# Altium PCB projet_pcb_bluepill_f103.PCBDOC
Units mil, origin at the board's own origin, x right, y up, seen from the top; angles counter-clockwise.
Board outline 3545 x 2760 mil, 2 copper layers (TopLayer, BottomLayer); 33 components, 45 nets, 142 pads, 41 vias.
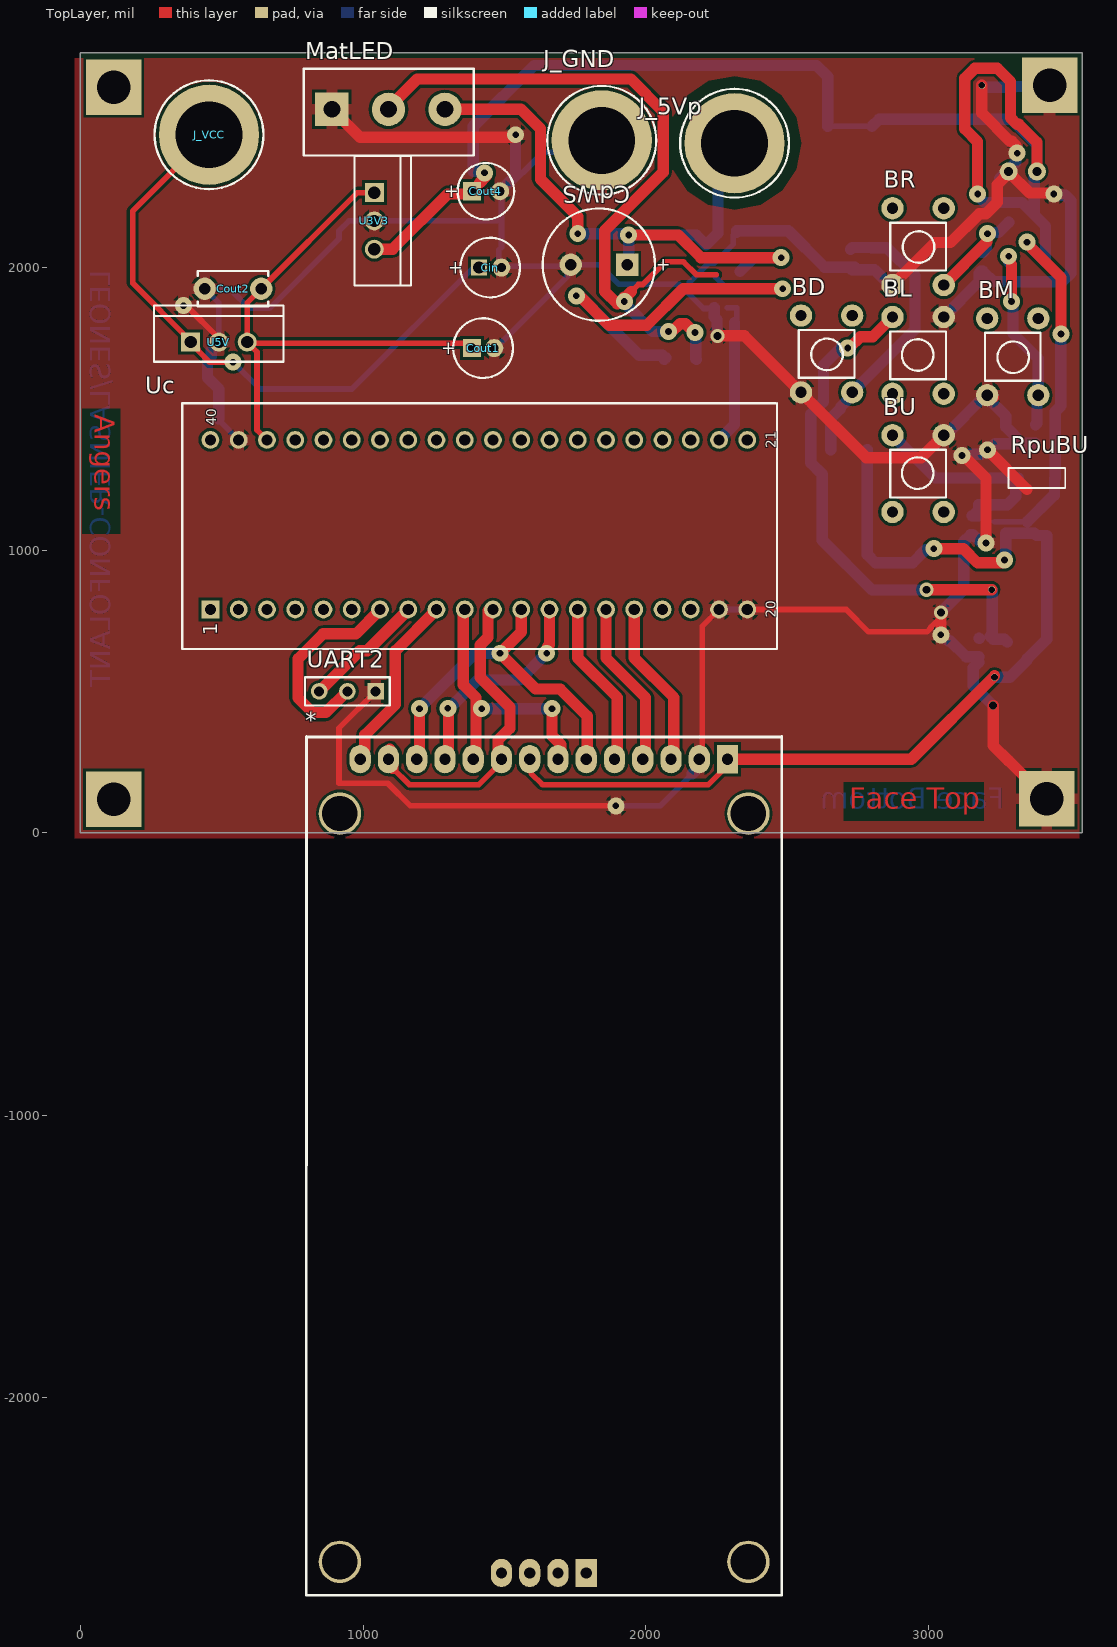
[diagram p0: TopLayer view]
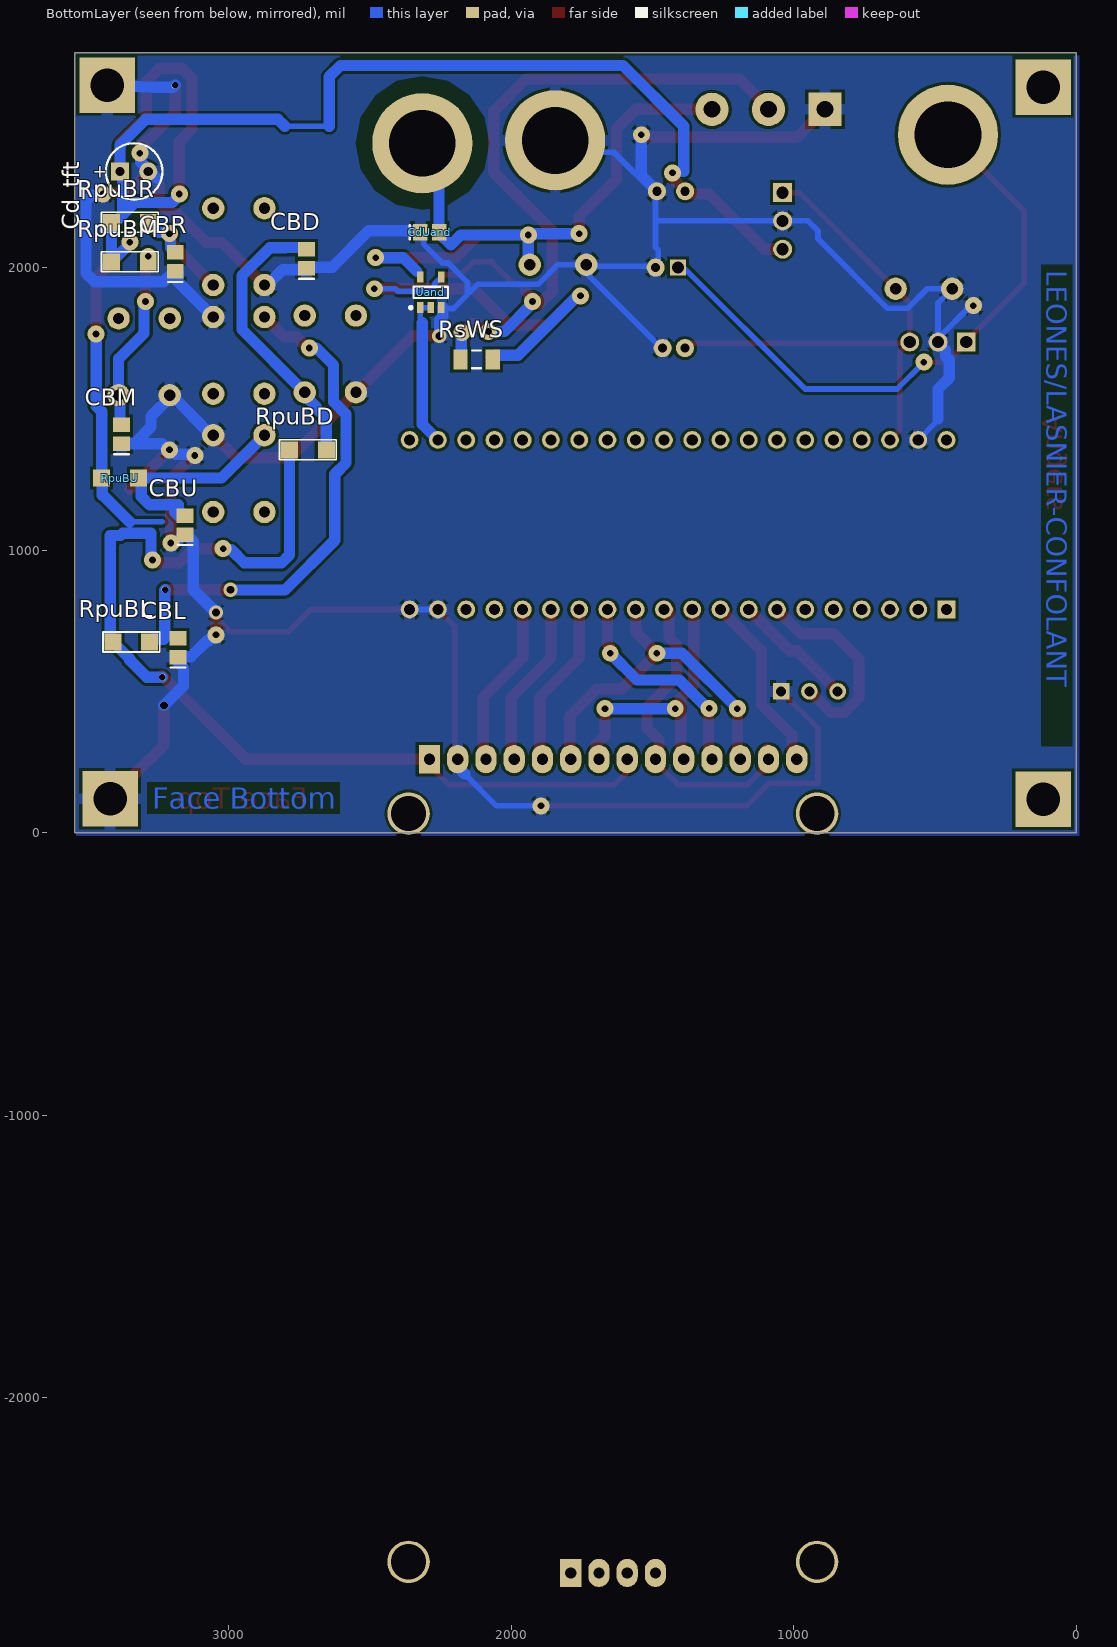
[diagram p1: BottomLayer view, seen from below]

## Layer stack, top to bottom
TopSolder: solder mask 0.4, Solder Resist, Dk 3.5
TopLayer: signal copper 1.4
Dielectric1: core 12.6, FR-4, Dk 4.8
BottomLayer: signal copper 1.4
BottomSolder: solder mask 0.4, Solder Resist, Dk 3.5

## Board outline
0,0 0,2760 3545,2760 3545,0

## Design rules (kind name [scope] priority, off if disabled: settings)
Clearance Clearance_1 [All] p1: gap=10 ignorepadtopadclearanceinfootprint=FALSE except(0: Arc-Hole Track-Hole SMDPad-Hole THPad-Hole Via-Hole Fill-Hole Poly-Hole Region-Hole Text-Hole)
Clearance PowerPlaneClearance [InNamedPolygon('Bot-GND') Or  InNamedPolygon('Top-GND')] p2: gap=40 ignorepadtopadclearanceinfootprint=FALSE except(0: Arc-Hole Track-Hole SMDPad-Hole THPad-Hole Via-Hole Fill-Hole Poly-Hole Region-Hole Text-Hole)
Clearance [All] p3: gap=20 ignorepadtopadclearanceinfootprint=TRUE except(0: Arc-Hole Track-Hole SMDPad-Hole THPad-Hole Via-Hole Fill-Hole Poly-Hole Region-Hole Text-Hole)
FabricationTestPointUsage TestPointUsage [All] p1: valid=0 allowmultiple=FALSE
FabricationTestpoint Testpoint [All] p1: side=3 testpointundercomponent=TRUE minsize=40 maxsize=100 preferedsize=60 minholesize=20 maxholesize=40 preferedholesize=32 testpointgrid=1 allowsidetop=TRUE allowsidebottom=TRUE usegrid=TRUE gridtolerance=0.01
Height [All] p1: minheight=0 maxheight=2000 prefheight=500
HoleSize [All] p1: absolutevalues=TRUE maxlimit=300 minlimit=11.81 maxpercent=80.000 minpercent=20.000
PlaneClearance [All] p1: clearance=40
PlaneConnect [All] p1: planeconnectstyle=Relief reliefexpansion=19.68 reliefentries=4 reliefconductorwidth=40 reliefairgap=19.68
PolygonConnect [All] p1: connectstyle=Relief reliefconductorwidth=40 reliefentries=4 polygonreliefangle="90 Angle" airgapwidth=10
RoutingVias [All] p1: holewidth=23.62 width=60 viastyle="Through Hole" minholewidth=23.62 minwidth=60 maxholewidth=23.62 maxwidth=60
SilkToSolderMaskClearance SilkscreenOverComponentPads [IsPad] p1: minsilkscreentomaskgap=10 clearancetoexposedcopper=TRUE
SolderMaskExpansion [All] p1: expansion=2
Width [All] p1: maxlimit=1000 minlimit=20 preferedwidth=40
23 further rules are at their usual default settings.

## Classes and differential pairs
component class projet_pcb_bluepill_f103: * BD BR BU CBD CBL CBM CBR CBU Cd_tft CdUand CdWS Cin Cout1 Cout2 Cout4 J_5Vp J_GND J_VCC MatLED RpuBD RpuBL RpuBM RpuBU RsWS U3V3 U5V Uand UART2 Uc

## Components (designator, comment, footprint, x,y, rotation, side; value= is the part's Value field where it differs from the comment)
* "2.4_TFT_TOUCH" 2.4_TFT_TOUCH 800,340 r270 top
BD "BOUTON_POUSSOIR_MINIATURE_TRAVERSANT" BOUTON_POUSSE_PLAT_6x6 2542.13,1542.6 r0 top
BL "BOUTON_POUSSOIR_MINIATURE_TRAVERSANT" BOUTON_POUSSE_PLAT_6x6 3062.87,1840.75 r180 top
BM "BOUTON_POUSSOIR_MINIATURE_TRAVERSANT" BOUTON_POUSSE_PLAT_6x6 3201.02,1532.6 r0 top
BR "BOUTON_POUSSOIR_MINIATURE_TRAVERSANT" BOUTON_POUSSE_PLAT_6x6 2866.02,1922.6 r0 top
BU "BOUTON_POUSSOIR_MINIATURE_TRAVERSANT" BOUTON_POUSSE_PLAT_6x6 3062.87,1422.4 r180 top
CBD "Condensateur 0805" C0805_N 2725,2031.54 r90 bottom value=100nF
CBL "Condensateur 0805" C0805_N 3180,655 r90 bottom value=100nF
CBM "Condensateur 0805" C0805_N 3380,1410 r90 bottom value=100nF
CBR "Condensateur 0805" C0805_N 3190,2020 r90 bottom value=100nF
CBU "Condensateur 0805" C0805_N 3155,1088.46 r90 bottom value=100nF
Cd_tft "10uF" CONDENSATEUR_POLARISE_ELECTROLYTIQUE_RADIAL_2.54/5.08 3385,2340 r180 bottom
CdUand "CONDENSATEUR_CER_RAD_5.08" C0805_N 2288.46,2125 r180 bottom value=100nF
CdWS "CONDENSATEUR_POL_ELECTROLY_RAD_5.08/10.16" CONDENSATEUR_POLARISE_ELECTROLYTIQUE_RADIAL_5.08/10.16 1935,2010 r180 top value=470µF/25V
Cin "CONDENSATEUR_POL_ELECTROLY_RAD_2.0/5.08" CONDENSATEUR_POLARISE_ELECTROLYTIQUE_RADIAL_2.0/5.08#1 1450,2000 r0 top value=10µF/>25V
Cout1 "CONDENSATEUR_POL_ELECTROLY_RAD_2.0/5.08" CONDENSATEUR_POLARISE_ELECTROLYTIQUE_RADIAL_2.0/5.08#2 1425,1715 r0 top value=1µF/>10V
Cout2 "CONDENSATEUR_CER_RAD_5.08" CONDENSATEUR_CERAMIQUE_RADIAL_5.08 440,1925 r0 top value=100nF
Cout4 "CONDENSATEUR_POL_ELECTROLY_RAD_2.54/5.08" CONDENSATEUR_POLARISE_ELECTROLYTIQUE_RADIAL_2.54/5.08 1385,2270 r0 top value=4.7µF/63V
J_5Vp "DOUILLE BANANE 4mm" DOUILLE_BANANE_4mm#1 2315,2440 r0 top
J_GND "DOUILLE BANANE 4mm" DOUILLE_BANANE_4mm#2 1845,2450 r0 top
J_VCC "DOUILLE BANANE 4mm" DOUILLE_BANANE_4mm#2 455,2470 r0 top
MatLED "BORNIER3 DROIT A VIS" BORNIER3_A_VIS 890,2560 r0 top
RpuBD "RESISTANCE_CMS_1206" RESISTANCE_CMS_1206#1 2655,1355 r0 bottom value=10k
RpuBL "RESISTANCE_CMS_1206" RESISTANCE_CMS_1206#1 3280,675 r0 bottom value=10k
RpuBM "RESISTANCE_CMS_1206" RESISTANCE_CMS_1206#1 3285,2020 r0 bottom value=10k
RpuBR "RESISTANCE_CMS_1206" RESISTANCE_CMS_1206#1 3285,2160 r0 bottom value=10k
RpuBU "RESISTANCE_CMS_1206" RESISTANCE_CMS_1206#2 3320,1255 r0 top value=10k
RsWS "220" R1206_N 2122.91,1675 r180 bottom
U3V3 "REGULATEUR_TO220_78XX" REGULATEUR_TO220_78XX 1040,2165 r270 top
U5V "REGULATEUR_TO220_78XX" REGULATEUR_TO220_78XX 490,1736.25 r0 top
Uand "SN74AHCT1G08DBVR" DBV0005A_N 2285,1912.13 r90 bottom
UART2 "BARRETTE3" HDR1X3 1045,500 r180 top
Uc "STM32F103C8T6/PCB_DIP40" STM32F103C8T6_DIP40 460,790 r90 top

## Footprints (in the part's own frame and the unit in brackets; to place one, negate y for a bottom-side part, rotate by r counter-clockwise, add the part's x,y. Pads: shape width x height; smd on the part's side, far side on the other; paste and mask are expansions set on the pad)
2.4_TFT_TOUCH [mil]
  round 150 hole 125: 0(272.44,1563.78) 0(272.44,118.11) 0(2920.47,1563.78) 0(2920.47,118.11)
  rect 100x75 hole 40: 1(80,1490) 18(2959.84,990)
  oval 100x75 hole 40: 2(80,1390) 3(80,1290) 4(80,1190) 5(80,1090) 6(80,990) 7(80,890) 8(80,790) 9(80,690) 10(80,590) 11(80,490) 12(80,390) 13(80,290) 14(80,190) 15(2959.84,690) 16(2959.84,790) 17(2959.84,890)
  silkscreen extent 0,-1 3039,1682, body extent 1,-15 3039,1667, height 650
BORNIER3_A_VIS [mm] "BORNIER 3 PLOTS A VIS ; VERTICAL ; ESPACEMENT BROCHES = 5.08mm"
  rect 3x3 hole 1.5: 1(0,0)
  round 3 hole 1.5: 2(5.08,0) 3(10.16,0)
  silkscreen extent -2.54,-4.16 12.74,3.64, body extent -2.4,-4 12.6,3.5, height 10
BOUTON_POUSSE_PLAT_6x6 [mil] "BOUTON POUSSOIR MINIATURE ON/OFF; BOUTON PLAT/LONG ; ESPACEMENT BROCHES = 7.62mm/5.08mm"
  round 79 hole 40: 1(7.87,15.75) 2(188.98,15.75) 3(188.98,287.4) 4(7.87,287.4)
  silkscreen extent 0,67 197,236, body extent -22,-1 222,310, height 276
C0805_N [mm] "Chip Capacitor, Body 2.0x1.3mm, IPC Medium Density"
  rect 1.3x1.5 smd: 1(-0.85,0) 2(0.85,0)
  silkscreen extent -1.8,-0.65 -1.8,0.65, body extent -0.99,-0.63 1.01,0.62, height 0.8
CONDENSATEUR_CERAMIQUE_RADIAL_5.08 [mil] "CONDENSATEUR TRAVERSANT CERAMIQUE RADIAL ; DIMENSIONS : 3.17mm x 5.08mm"
  round 79 hole 40: 1(0,0) 2(200,0)
  silkscreen extent -25,-62 225,62, body extent -11,-43 209,42, height 148
CONDENSATEUR_POLARISE_ELECTROLYTIQUE_RADIAL_2.0/5.08#1 [mil] "CONDENSATEUR POLARISE ELECTROLYTIQUE RADIAL ; DIAMETRE : 5.08mm ; ESPACEMENT BROCHES : 2mm"
  rect 56.93x56.93 hole 43.31: 1(-39.37,0)
  round 64 hole 32: 2(39.37,0)
  silkscreen extent -105,-106 106,106, body extent -98,-98 98,98, height 433
CONDENSATEUR_POLARISE_ELECTROLYTIQUE_RADIAL_2.0/5.08#2 [mil] "CONDENSATEUR POLARISE ELECTROLYTIQUE RADIAL ; DIAMETRE : 5.08mm ; ESPACEMENT BROCHES : 2mm"
  rect 64x64 / inner round 64 / far side round 64 hole 32: 1(-39.37,0)
  round 64 hole 32: 2(39.37,0)
  silkscreen extent -105,-106 106,106, body extent -98,-98 98,98, height 433
CONDENSATEUR_POLARISE_ELECTROLYTIQUE_RADIAL_2.54/5.08 [mil] "CONDENSATEUR_POLARISE_ELECTROLYTIQUE_RADIAL ; DIAMETRE : 5.08mm ; ESPACEMENT BROCHES : 2.54mm"
  rect 64x64 / inner round 64 / far side round 64 hole 32: 1(0,0)
  round 64 hole 32: 2(100,0)
  silkscreen extent -50,-100 150,100, body extent -50,-101 149,98, height 446
CONDENSATEUR_POLARISE_ELECTROLYTIQUE_RADIAL_5.08/10.16 [mil] "CONDENSATEUR POLARISE ELECTROLYTIQUE RADIAL ; DIAMETRE : 10.16mm ; ESPACEMENT BROCHES : 5.08mm"
  rect 79x79 / inner round 79 / far side round 79 hole 40: 1(0,0)
  round 79 hole 40: 2(200,0)
  silkscreen extent -98,-199 299,198, body extent -98,-197 295,197, height 630
DBV0005A_N [mm] "SOT23, 5-Leads, Body 3.05x1.75mm, Pitch 0.95mm, IPC Medium Density"
  rect 1x0.6 smd: 1(-1.375,0.95) 2(-1.375,0) 3(-1.375,-0.95) 4(1.375,-0.95) 5(1.375,0.95)
  silkscreen extent -1.5,-1.55 0.5,1.93, body extent -1.42,-1.46 1.42,1.46, height 1.08
DOUILLE_BANANE_4mm#1 [mm] "DOUILLE BANANE ; DIAMETRE PASSAGE CONTACT = 4 mm ; DIAMETRE PERCAGE = 6 mm"
  round 9 hole 6: 1(0,0)
  TopLayer pour cut-out: -5.55,2.35 -4.2,4.3 -2.3,5.6 0,6 2.3,5.6 4.2,4.3 5.55,2.35 6,0 5.55,-2.35 4.3,-4.25 2.35,-5.55 0,-6 -2.35,-5.55 -4.2,-4.3 -5.55,-2.35 -6,0
  BottomLayer pour cut-out: -5.55,2.35 -4.2,4.3 -2.3,5.6 0,6 2.3,5.6 4.2,4.3 5.55,2.35 6,0 5.55,-2.35 4.3,-4.25 2.35,-5.55 0,-6 -2.35,-5.55 -4.2,-4.3 -5.55,-2.35 -6,0
  silkscreen extent -4.89,-4.89 4.89,4.89, body extent -5.5,-5.6 5.63,5.53, height 4.79
DOUILLE_BANANE_4mm#2 [mm] "DOUILLE BANANE ; DIAMETRE PASSAGE CONTACT = 4 mm ; DIAMETRE PERCAGE = 6 mm"
  round 9 hole 6: 1(0,0)
  silkscreen extent -4.89,-4.89 4.89,4.89, body extent -5.5,-5.6 5.63,5.53, height 4.79
HDR1X3 [mm] "Connector; Header; 3 Position"
  rect 1.5x1.5 hole 0.9: 1(0,0)
  round 1.5 hole 0.9: 2(2.54,0) 3(5.08,0)
  silkscreen extent -1.27,-1.27 6.35,1.27
R1206_N [mm] "Chip Resistor, Body 3.2x1.6mm, IPC Medium Density"
  rect 1.3x1.8 smd: 1(-1.45,0) 2(1.45,0)
  silkscreen extent -0.4,-0.8 0.4,0.8, body extent -1.68,-0.87 1.68,0.87, height 0.71
REGULATEUR_TO220_78XX [mm] "BOITIER TO220 ; DIMENSIONS : 11.2mm x 4.7mm ; ESPACEMENT BROCHES : 2.54 mm"
  rect 1.7x1.7 hole 1.1: 1(-2.54,0)
  round 1.7 hole 1.1: 2(0,0) 3(2.54,0)
  silkscreen extent -5.83,-1.77 5.8,3.29, body extent -5.61,-1.59 5.61,3.1, height 19.33
RESISTANCE_CMS_1206#1 [mil] "RESISTANCE CMS 1206 ; DIMENSIONS : 3.2mm x 1.6mm"
  rect 60x60 smd: 1(0,0) 2(130,0)
  silkscreen extent -35,-35 165,35, body extent 0,-31 126,31, height 39
RESISTANCE_CMS_1206#2 [mil] "RESISTANCE CMS 1206 ; DIMENSIONS : 3.2mm x 1.6mm"
  rect 60x60 smd far side: 1(0,0) 2(130,0)
  silkscreen extent -35,-35 165,35, body extent 0,-31 126,31, height 39
STM32F103C8T6_DIP40 [mm] "STM32F103 monté sur DIP40"
  rect 1.6x1.6 hole 1: 1(0,0)
  round 1.6 hole 1: 2(0,-2.54) 3(0,-5.08) 4(0,-7.62) 5(0,-10.16) 6(0,-12.7) 7(0,-15.24) 8(0,-17.78) 9(0,-20.32) 10(0,-22.86) 11(0,-25.4) 12(0,-27.94) 13(0,-30.48) 14(0,-33.02) 15(0,-35.56) 16(0,-38.1) 17(0,-40.64) 18(0,-43.18) 19(0,-45.72) 20(0,-48.26) 21(15.24,-48.26) 22(15.24,-45.72) 23(15.24,-43.18) 24(15.24,-40.64) 25(15.24,-38.1) 26(15.24,-35.56) 27(15.24,-33.02) 28(15.24,-30.48) 29(15.24,-27.94) 30(15.24,-25.4) 31(15.24,-22.86) 32(15.24,-20.32) 33(15.24,-17.78) 34(15.24,-15.24) 35(15.24,-12.7) 36(15.24,-10.16) 37(15.24,-7.62) 38(15.24,-5.08) 39(15.24,-2.54) 40(15.24,0)
  silkscreen extent -3.56,-50.92 18.54,2.54, body extent -3.63,-51.04 18.37,6.1, height 20.63

## Part data
BD BL BM BR BU: "BOUTON POUSSOIR MINIATURE TRAVERSANT ON/OFF", Type=B_POUSS_MINI_T
CBD CBL CBM CBR CBU: library part CONDENSATEUR_CER_RAD_5.08, Type=RADIAL_5.08
Cd_tft: library part Condensateur, "Capacitor", LatestRevisionDate=17-Jul-2002, LatestRevisionNote="Re-released for DXP Platform.", PackageReference=RAD-0.3, Published=8-Jun-2000, Publisher="Altium Limited"
CdUand: "CONDENSATEUR_CER_CMS_0805", Type=RADIAL_5.08
CdWS: "CONDENSATEUR POLARISE ELECTROLYTIQUE RADIAL 5.08/10.16", Type=POL_RAD_5.08/10.16
Cin Cout1: "CONDENSATEUR POLARISE ELECTROLYTIQUE RADIAL 2.0/5.08", Type=POL_RAD_2.0/5.08
Cout2: "CONDENSATEUR TRAVERSANT CERAMIQUE RADIAL 5.08mm", Type=RADIAL_5.08
Cout4: "CONDENSATEUR POLARISE ELECTROLYTIQUE RADIAL 2.54/5.08", Type=POL_RAD_2.54/5.08
J_5Vp J_GND J_VCC: library part DOUILLE_BANANE_4mm, "DOUILLE BANANE 4 mm", Type=BANANE_4mm
MatLED: library part "BORNIER3_DROIT_A VIS", "BORNIER 3 PLOTS DROIT A VIS 5.08mm", Type=BORNIER3_D
RpuBD RpuBL RpuBM RpuBR RpuBU: "RESISTANCE CMS 1206", Type=CMS_1206
RsWS: library part Resistor, "Resistor", LatestRevisionDate=17-Jul-2002, LatestRevisionNote="Re-released for DXP Platform.", PackageReference=AXIAL-0.5, Published=8-Jun-2000, Publisher="Altium Limited"
U3V3 U5V: "REGULATEUR DE TENSION POSITIVE 78XX BOITIER TO220", Package=(TO220)
  U3V3: Type=LF33CV
  U5V: Type=7805
Uand: "Single 2-Input Positive-AND Gate, DBV0005A, LARGE T&R", F @ Nom Voltage(Max)(Mhz)=75, Generic Part Number=SN74AHCT1G08, ICC @ Nom Voltage(Max)(mA)=0.01, Manufacturer="Texas Instruments", Operating Temperature Range(C)="-40 to 125", Rating=Catalog, Supplier Part Number 1=595-SN74AHCT1G08DBVR, tpd @ Nom Voltage(Max)(ns)=7.1, Voltage(Nom)(V)=5, 3-State Output=No, Bits(#)=1, ComponentLink1Description="Manufacturer URL", ComponentLink1URL=http://www.ti.com/, ComponentLink2Description=Datasheet, ComponentLink2URL=http://www.ti.com/lit/ds/symlink/sn74ahct1g08.pdf, DatasheetVersion=SCLS315P, Gate Type=AND, Input Type=CMOS, Logic=True, Output Drive (IOL/IOH)(Max)(mA)=8/-8, Output Type=CMOS, PackageReference=DBV0005A, PartNumber=SN74AHCT1G08DBVR, Schmitt Trigger=No, Sub-Family="AND Gate", Supplier 1=Mouser, Supplier 2=Digi-Key, Supplier 3=Digi-Key, Supplier 4=Digi-Key, Supplier Part Number 2=296-1113-2-ND, Supplier Part Number 3=296-1113-1-ND, Supplier Part Number 4=296-1113-6-ND, Technology Family=AHCT, VCC(Max)(V)=5.5, VCC(Min)(V)=2
UART2: "Header, 3-Pin", LatestRevisionDate=17-Jul-2002, LatestRevisionNote="Re-released for DXP Platform.", Publisher="Altium Limited"
Uc: "MICROCONTROLEUR 32 BITS - 72MHz - 34 I/O - 64 KO : FLASH - 20KO RAM - 10 CANAUX A/D 12 BITS - DIP40 - UART, SPI, I2C, USB, CAN", Package=DIP40, Type=STM32F103C8T6

## Free pads (board coordinates)
  rect 196.85x196.85 hole 118.11: 1(118.11,2637.8) 2(118.11,118.11) 3(3420,120) 4(3430,2645)

## Via types
v1: diameter 60, hole 23.62, TopLayer to BottomLayer, 34 vias
v2: diameter 50, hole 28, TopLayer to BottomLayer, 3 vias
v3: diameter 25, hole 23.62, TopLayer to BottomLayer, 3 vias
v4: diameter 28, hole 28, TopLayer to BottomLayer, 1 vias

## Nets (pads, with @x,y where several pads share a name; then routed paths per layer and width w, separated by ;. In a path a pad name is that pad's centre, name@x,y a point inside that pad or via, vN(x,y) a via of type N, cw(c..) or ccw(c..) an arc to the next point about the centre after c; other vN are vias at no path point)
+3V3: *.1 *.8 Cd_tft.1 Cout4.1 RpuBD.2 RpuBL.2 RpuBM.2 RpuBR.2 RpuBU.2 U3V3.3 | length 9606.2
  TopLayer w20: *.8@1595,255 1595,210 1635,170 2222.1,170 2290,237.9 *.1
  TopLayer w40: U3V3.3@1045,2065 1105,2065 1300,2260 Cout4.1@1370,2260 ; Cout4.1@1413,2299.82 1437,2323.82 1437,2328 v1(1430,2335) ; *.8 *.8@1595,255 ; *.1@2305,285 2305,262.5 2307.5,260 2940,260 v3@3235,555 ; v1(3020,1005) 3125.21,1005 3175.21,955 3260,955 v1(3270,965) ; v1(3175,2260) 3175,2445.13 3130,2490.13 3130,2669.85 3165.15,2705 3245,2705 3291.57,2658.43 3291.57,2530.01 3315.01,2506.57 3321.45,2506.57 3385,2443.03 Cd_tft.1 ; v1(3350,2090) 3350,2085 3470,1965 v1(3470,1765)
  BottomLayer w20: *.1@2298.49,251.51 *.1@2303.53,251.51 ; 2645,2500 2801.47,2500 ; 3235,1100 3350.41,1100
  BottomLayer w40: Cout4.1@1390,2260 Cout4.1@1390,2270 ; v1@1430,2340 1390,2340 1390,2500 1605,2715 2605,2715 2645,2675 2645,2500 ; RpuBD.2 2785,983.43 2813.43,955 2945,955 2991.17,1001.17 3016.17,1001.17 v1(3020,1005) ; 2801.47,2500 2825.97,2524.5 3294.49,2524.5 3385,2433.99 Cd_tft.1 3375,2330 3375,2200 ; v1(3175,2260) 3175,2255 3200,2230 3331.57,2230 3415,2146.57 RpuBM.2 3350,2085 v1(3350,2090) ; v3(3235,550) 3290,550 3350,610 3350,615 RpuBL.2 3420,685 3420,1051.68 3383.32,1051.68 3375,1060 3275,1060 3275,970 3273.83,968.83 v1@3273.83,988.97 ; 3350.41,1100 3444.59,1194.18 ; 3447.5,1194.18 3447.5,1252.5 RpuBU.2 3450,1490.25 3469.5,1509.75 3469.5,1764.5 v1(3470,1765)
+3V3_BP: Uc.40
+3V3_BP2: Uc.18
+5V: Cout1.1 Cout2.2 U3V3.1 U5V.3 Uc.38 | length 1947.4
  TopLayer w20: Uc.38 625,1425 625,1701.25 U5V.3 U5V.3@590,1740 ; U3V3.1@1040,2275 U3V3.1@1041.06,2275 ; U3V3.1@1043.94,2265 1041.06,2265 U3V3.1 980,2265 Cout2.2 590,1875 U5V.3@590,1740 ; Cout1.1@1400.63,1725 1393.13,1732.5 597.5,1732.5 U5V.3@590,1740
+5V_Puissance: CdUand.2 CdWS.1 J_5Vp.1 MatLED.3 Uand.5 | length 2560.6
  TopLayer w40: MatLED.3 1558.99,2560 1627.83,2491.16 1627.83,2312.58 1760,2180.41 v1(1760,2120) ; v1(1940,2115) 2115.71,2115 2195.71,2035 v1(2480,2035) ; J_5Vp.1 J_5Vp.1@2350.05,2404.95
  BottomLayer w40: v1(1760,2120) 1935,2120 v1(1940,2115) ; CdWS.1 1940,2015 v1(1940,2115) ; J_5Vp.1 2256.34,2381.34 2256.34,2126.34 CdUand.2 2255,2121.06 2213.94,2080 2178.94,2115 v1(1940,2115) ; Uand.5@2334.13,1985.87 2383.27,2035 v1(2480,2035)
GND: *.2 BD.1 BL.1 BM.1 BR.1 BU.1 CBD.1 CBL.1 CBM.1 CBR.1 CBU.1 Cd_tft.2 CdUand.1 CdWS.2 Cin.2 Cout1.2 Cout2.1 Cout4.2 J_GND.1 MatLED.1 pad.3 pad.4 U3V3.2 U5V.2 Uand.3 UART2.1 Uc.19 Uc.20 Uc.39 | length 15262.5
  TopLayer w20: v1(365,1865) 374.36,1865 490,1749.36 U5V.2@490,1740 ; UART2.1 915,370 915,175 1087.72,175 1167.72,95 v1(1895,95) ; *.2@2175,235 2200,260 2200,730 Uc.19 ; *.2 *.2@2190,287.38 ; Uc.20 2710,790 2789.5,710.5 2995.5,710.5 3010,725 3010,727.93 3045.61,763.55 3046.1,764.03 v2@3046.1,780
  TopLayer w40: MatLED.1@885,2575 885,2565 MatLED.1 989.06,2460.94 1530.94,2460.94 v1(1540,2470) ; v2(2255,1758.35) 2350,1758.35 BD.1 2781.19,1327.15 2975.5,1327.15 BU.1 ; BR.1 3023.96,2088.41 3079.41,2088.41 3181.01,2190 3203.99,2190 3245,2231.01 3245,2293.51 3285,2333.51 Cd_tft.2@3285,2338.18 ; v1(3045.12,700) 3045.61,700.49 3045.61,763.55 v2(3045.61,779.51) v2@3046.1,780 ; v1(3120,1335) 3125,1335 3205,1255 v1(3205,1025) ; v3(3190,2645) 3190,2546.73 3290.15,2446.57 3296.6,2446.57 3311.17,2432 3311.17,2408.83 v1(3315,2405) ; v1(3210,1355) 3350,1215 ; BM.1@3222.54,1547.46 BM.1@3230,1540 ; v4(3230,450) 3230,308.31 3283.31,254.99 3285.01,254.99 pad.3 ; Cd_tft.2 Cd_tft.2@3285,2338.18 ; v1(3445,2260) 3441.17,2263.83 3359.35,2263.83 Cd_tft.2@3285,2338.18
  BottomLayer w20: v1(365,1865) 374.36,1865 490,1749.36 490,1875 Cout2.1 528.27,1925 597.77,1855.5 668.79,1855.5 915,2101.71 915,2130 950,2165 U3V3.2 1489,2165 1490,2166 ; 495,1455 Uc.39 ; Cin.2@1471.58,2008.42 1480,2000 1480,2062 1490,2072 1490,2166 ; Cout1.2@1479.37,1725 1723.71,1969.34 1723.71,1998.71 CdWS.2@1730,2005 ; Cin.2@1485,2005 CdWS.2@1730,2005 ; J_GND.1 1802.83,2407.83 1637.83,2407.83 1490,2260 1490,2166 ; v1(1895,95) 2052.1,95 2165,207.9 ; Uand.3@2243.19,1857.99 2240.2,1855 2205,1855 2155,1905 ; Uc.19 Uc.20 ; CdUand.1 2310.59,2113.66 2310.59,2083.05 2243.49,2015.94 2223.36,2015.94 2155,1947.58 2155,1905 ; CdWS.2@1730,2005 CdWS.2 1836.71,2010 1906.21,1940.5 2119.5,1940.5 2155,1905
  BottomLayer w40: 490,1465 490,1570 450,1610 450,1672.75 463.46,1686.22 463.46,1707.46 481.01,1725 490,1725 U5V.2 ; Cout4.2 1540,2325 v1(1540,2470) ; 2165,207.9 2165,208.03 2187.5,230.53 *.2@2187.5,252.5 ; Uand.3@2243.19,1857.99 2243.19,1825.88 2253.09,1815.98 2253.09,1760.26 v2(2255,1758.35) ; CdUand.1 2321.93,2128.94 2322.99,2130 2505,2130 2633.46,2001.54 CBD.1@2740,2001.54 ; CBD.1 2730.59,1992.48 2809.21,1992.48 2863.34,1938.35 BR.1 ; v1(3045.12,700) 3050.54,700 3071.09,679.44 3077.34,679.44 3133.9,622.87 3178.66,622.87 CBL.1 ; v2@3046.1,780 3125.6,859.5 3125.6,1029.54 3151.06,1055 CBU.1 ; BU.1 3061.1,1406.65 3202.8,1548.35 BM.1 3208.9,1540.1 3275.13,1473.87 3275.13,1436.65 3333.9,1377.87 3378.66,1377.87 CBM.1 3236.95,1376.54 3215.41,1355 v1(3210,1355) 3204.59,1355 3188.41,1338.83 3123.83,1338.83 v1(3120,1335) ; BL.1 3180.47,1950.47 3180.47,1980.94 3186.06,1986.54 CBR.1 3193.94,1986.54 3230.47,1950 3475,1950 3505,1980 3505,2236.57 3485.4,2256.17 3448.83,2256.17 v1(3445,2260) ; CBU.1@3160.59,1049.41 CBU.1 ; CBL.1@3170.47,612.01 3170,611.54 3178.77,602.77 3160,583.99 3160,520 v4(3230,450) ; v3(3190,2645) 3197.2,2637.8 3271.61,2637.8 pad.4 ; v1(3205,1025) 3201.17,1028.83 3185.11,1028.83 3158.94,1055 CBU.1 ; 3253.51,2315 3278.51,2340 Cd_tft.2@3282.5,2340 ; Cd_tft.2 Cd_tft.2@3282.5,2340 ; v1(3315,2405) 3311.17,2401.17 3311.17,2372.67 3282.5,2343.99 Cd_tft.2@3282.5,2340
LEDS_WS2812: Uand.1 Uand.2 Uc.22 | length 526.8
  BottomLayer w20: Uand.2@2289.41,1857.99 Uand.1 2322.4,1812.4 2315,1805
  BottomLayer w40: Uc.22 2315,1445 2315,1805
NetBD_2: BD.2 CBD.2 RpuBD.1 | length 1011.7
  BottomLayer w40: RpuBD.1 2655,1466.06 2689.5,1500.56 2689.5,1506.19 2731.1,1547.79 BD.2 2953.4,1780.64 2953.4,1971.28 2854.67,2070 2800,2070 2799.41,2070.59 2730.59,2070.59 CBD.2
NetBL_2: BL.2 CBL.2 RpuBL.1 | length 1884
  TopLayer w40: v1(2715,1715) 2720.41,1715 2760.05,1754.64 2803.54,1754.64 BL.2 ; v2@2992.94,858.94 2994,860 v3(3225,860)
  BottomLayer w40: v1(2715,1715) 2690,1715 2629.5,1654.5 2629.5,1525.42 2585,1480.92 2585,1308.43 2625,1268.43 2625,1035 2801.06,858.94 2992.94,858.94 v2@2994.5,860.5 ; CBL.2 CBL.2@3181.34,687.13 ; v3(3225,860) 3227.03,857.97 3227.03,702.03 3220,695 3230,685 3270,685 RpuBL.1
  other v2: 2993.72,859.72
NetBM_2: BM.2 CBM.2 RpuBM.1 | length 624.2
  TopLayer w40: v1(3295,1880) 3295,2010
  BottomLayer w40: RpuBM.1 RpuBM.1@3295,2010 ; v1(3295,1880) 3300,1875 3300,1766.95 3390,1676.95 BM.2 3385,1543.35 3385,1448.46 CBM.2
  other v1: 3285,2040
NetBR_2: BR.2 CBR.2 RpuBR.1 | length 425.1
  TopLayer w40: BR.2@3055,1927.79 BR.2 3206.92,2090.27 3206.92,2116.92 v1(3210,2120)
  BottomLayer w40: CBR.2 3193.94,2053.46 3199.53,2059.06 3199.53,2062.99 3206.17,2069.64 3206.17,2116.17 v1(3210,2120) 3213.83,2123.83 3248.83,2123.83 RpuBR.1
NetBU_2: BU.2 CBU.2 RpuBU.1 | length 814.4
  BottomLayer w40: BU.2 3025.55,1255 RpuBU.1 3310,1245 3310,1190 3280,1160 3178.43,1160 3178.43,1141.42 3158.94,1121.93 CBU.2 3155.96,1120.96 3176.97,1120.96 3191.01,1135
NetRsWS_2: RsWS.2 Uand.4 | length 1519.4
  TopLayer w40: v1(1755,1900) 1766.51,1900 1871.01,1795.5 2003.85,1795.5 2133.35,1925 v1(2485,1925)
  BottomLayer w20: Uand.4@2247.6,1974.13 Uand.4 2270.86,1943 2270.86,1934.14 2289.13,1915.87 2400.87,1915.87 2410,1925 v1(2485,1925)
  BottomLayer w40: v1(1755,1900) 1766.51,1900 1976.74,1689.76 2060.24,1689.76 2065.83,1684.17 RsWS.2 RsWS.2@2071.42,1680.59
PA0_AN0: Uc.5
PA1_AN1: Uc.6
PA2_U2TX: UART2.2 Uc.7 | length 728.9
  TopLayer w40: UART2.2 943.33,500 868.33,425 821.67,425 770,476.67 770,615 858.66,703.66 974.77,703.66 1060,788.89 Uc.7
PA3_U2RX: UART2.3 Uc.8 | length 436.9
  TopLayer w40: UART2.3 988.66,643.66 1014.77,643.66 1160,788.89 Uc.8
  BottomLayer w40: Uc.8@1160,788.89 Uc.8
PA4_TOUCH-IRQ: *.14 Uc.9 | length 607.7
  TopLayer w40: *.14@1000,290 1006.7,296.7 1006.7,346.07 1114.53,453.9 1114.53,643.42 1260,788.89 Uc.9
PA5_TFT-SCK: *.7 *.10 Uc.10 | length 963.2
  TopLayer w40: Uc.10 1360,783.78 1355,778.78 1355,522.91 1400,477.91 1400,438.75 1400,435 1400,415 ; *.10@1400,290 1400,415 ; v1(1420,438.75) 1420,435 1411.88,426.88 1400,415 ; v1(1668.75,438.75) 1668.75,343.22 1700,311.97 *.7@1700,290
  BottomLayer w40: v1(1420,438.75) v1(1668.75,438.75)
PA6_TFT-MISO: *.9 *.13 Uc.11 | length 1094.2
  TopLayer w20: *.13@1105,228.43 1163.43,170 1410,170 *.9@1485,245
  TopLayer w40: *.13@1095,295 1095,273.03 1105,263.03 *.13@1105,228.43 ; Uc.11@1442.43,786.2 1442.43,691.42 1415,663.99 1415,548.99 1520,443.99 1520,370 1477.5,327.5 *.9@1477.5,270.4
PA7_TFT-MOSI: *.6 *.12 Uc.12 | length 1227.4
  TopLayer w40: *.12@1200,290 v1(1200,438.99) ; Uc.12 1560,710 v1(1485,635) 1611.25,508.75 1697.74,508.75 1793.3,413.19 1793.3,296.7 *.6@1800,290
  BottomLayer w40: v1(1200,438.99) 1396.01,635 v1(1485,635)
PA8: Uc.25
PA9: Uc.26
PA10: Uc.27
PA11: Uc.28
PA12: Uc.29
PA15: Uc.30
PB0_TOUCH-CS: *.11 Uc.13 | length 742
  TopLayer w40: *.11@1300,290 1302.5,292.5 1302.5,437.5 v1(1300,440) ; v1(1650,635) 1653.83,638.83 1653.83,658.83 1660,665 Uc.13
  BottomLayer w40: v1(1300,440) 1305.15,440 1405.66,540.51 1555.51,540.51 v1(1650,635)
PB1_TFT-DC: *.5 Uc.14 | length 558
  TopLayer w40: Uc.14 1760,617.87 1900,477.87 *.5@1900,290
PB3: Uc.31
PB4: Uc.32
PB5: Uc.33
PB6_U1TX: Uc.34
PB7_U1RX: Uc.35
PB8_I2C_SCL: Uc.36
PB9_I2C_SDA: Uc.37
PB10_TFT-RESET: *.4 Uc.15 | length 558
  TopLayer w40: Uc.15 1860,617.87 2000,477.87 *.4@2000,290
PB11_TFT-CS: *.3 Uc.16 | length 558
  TopLayer w40: Uc.16 1960,617.87 2100,477.87 *.3@2100,290
PB12: Uc.21
PB14: Uc.23
PB15: Uc.24
PC14_OSC32: Uc.3
PC15_OSC32: Uc.4
VCC: Cin.1 J_VCC.1 U5V.1 | length 2190.4
  TopLayer w20: J_VCC.1 185,2200 185,1945 390,1740 U5V.1 416.54,1709.71 416.54,1705.82 457.36,1665 v1(540,1665)
  BottomLayer w20: v1(540,1665) 635,1570 960,1570 Cin.1@1397.5,2007.5
WS2812_data: MatLED.2 RsWS.1 | length 2751.3
  TopLayer w20: 1950,1915.5 1974.5,1940 1990,1940 2070,2020 2134.29,2020 2179.29,1975 2250,1975
  TopLayer w40: MatLED.2@1085,2560 1192.17,2667.17 1947.83,2667.17 2062.17,2552.83 2062.17,2337.46 1855.5,2130.79 1855.5,1915.41 1900,1870.91 1925,1895.91 v1(1925,1880) 1925,1890.5 1949.5,1915 1950,1915.5 ; v1@2077.35,1770 v1(2081.17,1773.83) 2086.59,1773.83 2090.41,1770 2121.59,1801.17 2141.17,1801.17 2172.35,1770 v1(2175,1770)
  BottomLayer w40: MatLED.2@1090,2550.3 MatLED.2 ; v1(1925,1880) 1925,1873.47 2024.65,1773.83 v1(2081.17,1773.83) ; v1(2175,1770) 2177.5,1767.5 2177.5,1677.5 RsWS.1
pads on no net: *.0 *.15 *.16 *.17 *.18 BD.3 BD.4 BL.3 BL.4 BM.3 BM.4 BR.3 BR.4 BU.3 BU.4 Uc.1 Uc.2 Uc.17

## Polygon pours and split planes (outlines as drawn)
GND on BottomLayer "Bot-GND" (solid, pour order 5): -10,2750 3540,2750 3540,-10 -10,-10
GND on TopLayer "Top-GND" (solid, pour order 4): -20,2740 3535,2740 3535,-20 -20,-20

## Other copper
TopLayer:
  text "Angers" at 50,1480 h70.87 r270
  text "Face Top" at 2720,85 h75
BottomLayer:
  text "LEONES/LASNIER-CONFOLANT" at 105,1990 h70.87 r90
  text "Face Bottom" at 3270,85 h75

## Silkscreen, mask and mechanical layers (free items; w line width, h text height)
TopOverlay:
  text "Consignes / Conseils :" at 5815,1405 h393.7
  text "1- désactivez la fonctionnalité \"online DRC\"" at 6300,1040 h393.7
  text "Tools->Preferences -> décocher 'online DRC'" at 6775,655 h393.7
  text "Tools->Reset error markers" at 6790,230 h393.7
  text "2- Déplacez les plans de masse en dehors de la carte" at 6295,-195 h393.7
  text "3- Si elles sont visibles / gênantes : masquez les couches mécaniques 3D" at 6270,-720 h393.7
  text "Bouton-droit sur les onglets (en bas) Mechanical1, 13 -> Hide" at 6820,-1165 h393.7
  text "4- mettre vos noms à la place de \"nom du binôme\"" at 6265,-1710 h393.7
  text "5- Par défaut, la taille de piste minimale est définie à 20 mils.  /     Si cela s'avère utile(passage entre deux broches espacées de 2,54mm...), vous pouvez modifier ce réglage dans /     -> Design -> Rules -> Routing -> Width -> Width" at 6245,-3360 h393.7
  text "6- Par défaut, la clearance (espace minimale entre deux objets dont le net diffère) est reglée à 20 mils. /     Si cela s'avère nécessaire (petit composant CMS / volonté assumée d'une règle moins stricte), /      vous pouvez descendre à 10mils : /     -> Design -> Rules -> Electrical -> Clearance-> Clearance" at 6255,-4935 h393.7
Mechanical1:
  lines w20: -20,668.75 -20,2046.25 -20,2735 ; -20,2740 0,2040 0,660 ; 0,517.5 0,690 ; 0,2760 221.56,2760 664.69,2760 886.25,2760 2658.75,2760 3550,2760 3550,25 3525,0 2643.75,0 881.25,0 0,0 0,688.75 ; 887.5,0 2662.5,0 3550,0 ; 0,688.75 0,688.75 ; 0,2755 0,2755

## Text inside footprints (layer, text, board x,y; h text height)
Cd_tft: BottomOverlay "+" at 3481.85,2318.35 h45
CdWS: TopOverlay "+" at 2088.94,2029.29 h45 r180
Cin: TopOverlay "+" at 1301.18,1978.35 h45
Cout1: TopOverlay "+" at 1276.18,1693.35 h45
Cout4: TopOverlay "+" at 1288.15,2248.35 h45
Uc: TopOverlay "1" at 483.62,699.45 h50 r90; TopOverlay "20" at 2460,760 h35.43 r90; TopOverlay "40" at 480,1440 h35.43 r90; TopOverlay "21" at 2460,1360 h35.43 r90